# Altium PCB BUZT13-01CN-E-201-20140930.PcbDoc (part 2 of 2)
Units mm, origin at the board's own origin, x right, y up, seen from the top; angles counter-clockwise.
Board outline 64.01 x 46.1 mm, 2 copper layers (Top Layer, Bottom Layer); 112 components, 79 nets, 311 pads, 291 vias.
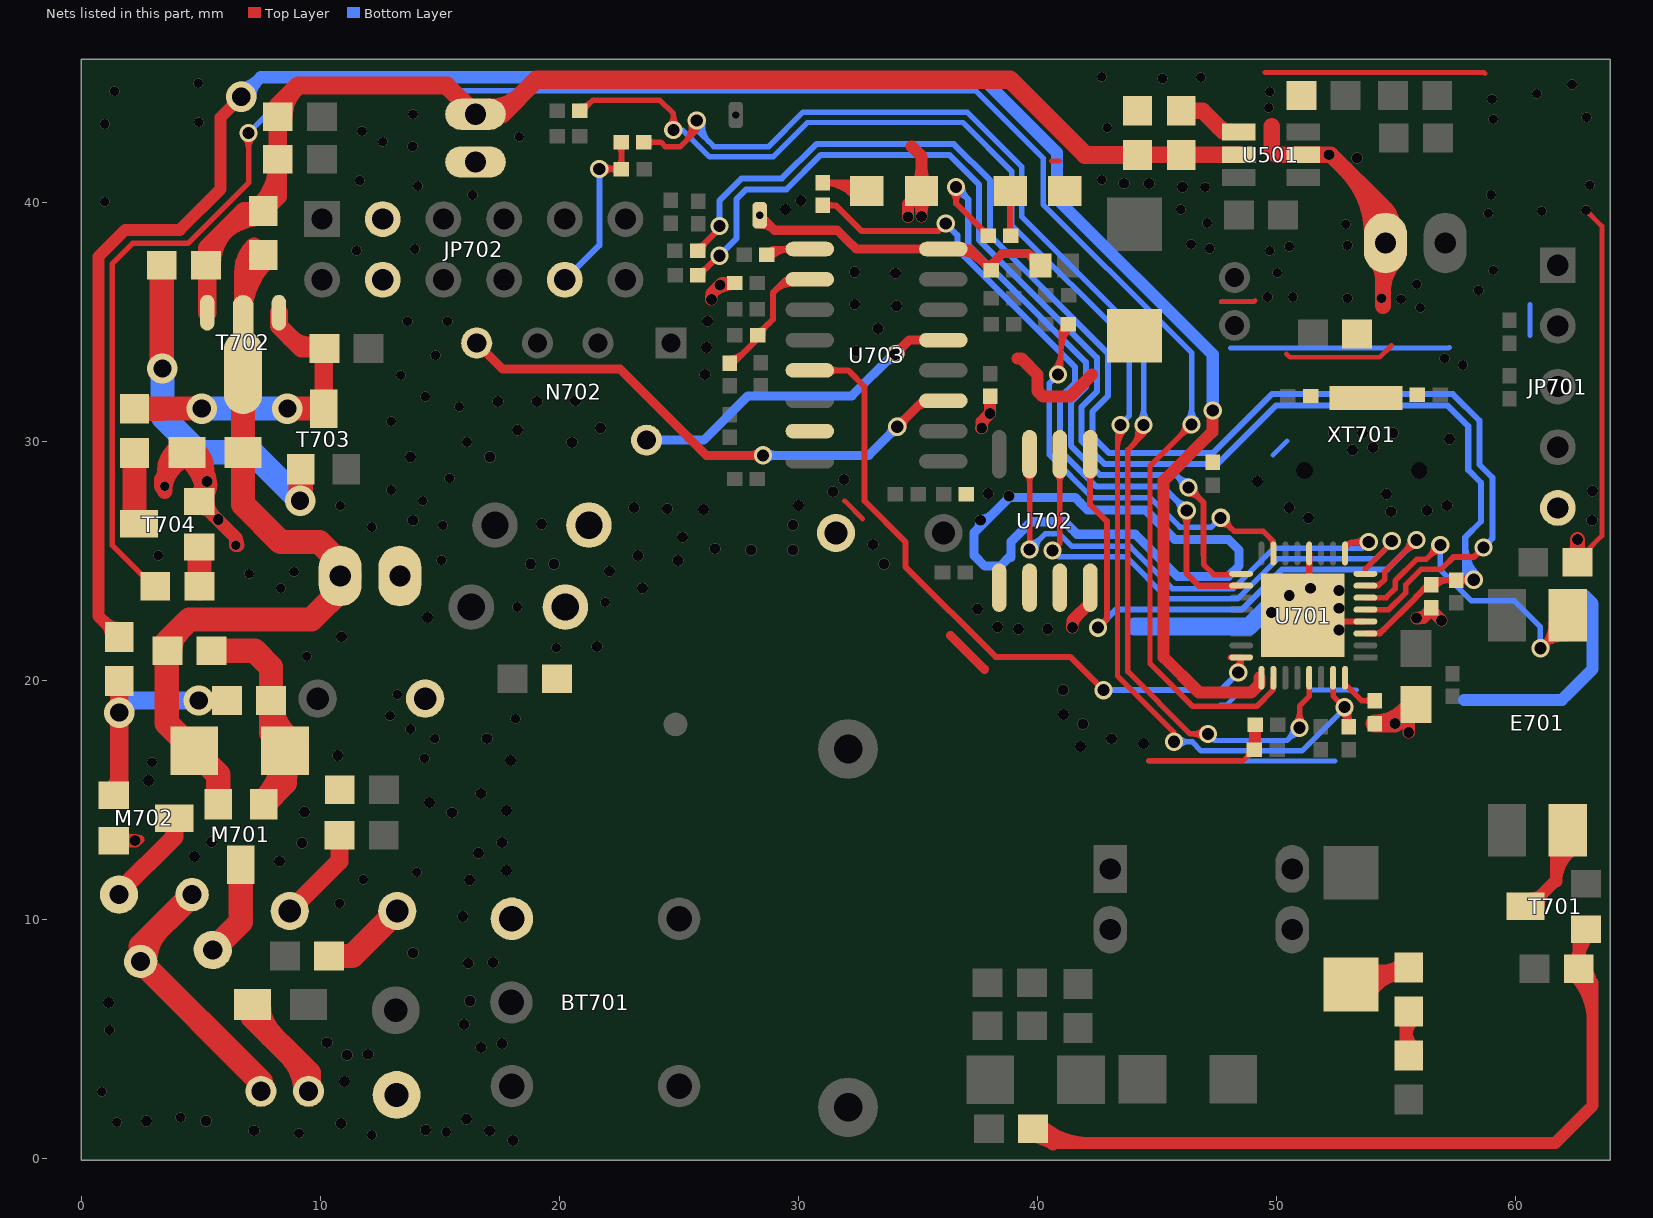
[diagram p2: the nets of this part, all layers, seen from the top]

## Via types
v1: diameter 0.457, hole 0.457, Top Layer to Bottom Layer, 135 vias
v2: diameter 0.406, hole 0.406, Top Layer to Bottom Layer, 96 vias
v3: diameter 0.762, hole 0.508, Top Layer to Bottom Layer, 46 vias
v4: diameter 1.27, hole 0.762, Top Layer to Bottom Layer, 11 vias
v5: diameter 0.889, hole 0.508, Top Layer to Bottom Layer, 3 vias

## Nets (pads, with @x,y where several pads share a name; then routed paths per layer and width w, separated by ;. In a path a pad name is that pad's centre, name@x,y a point inside that pad or via, vN(x,y) a via of type N, cw(c..) or ccw(c..) an arc to the next point about the centre after c; other vN are vias at no path point) (continued)
NetC720_1: C720.1 R726.2 T701.B | length 45.8
  Top Layer w0.508: R726.2@39.723,1.124 ccw(c40.857,2.258) 40.857,0.654 ; R726.2@39.812,1.416 40.574,0.654 42.788,0.654 ; R726.2@39.85,0.893 cw(c39.889,-0.184) 40.651,0.578 ; R726.2@40.082,1.483 ccw(c42.083,3.484) 42.083,0.654 ; 42.276,0.654 42.788,0.654 ; 43.703,0.654 42.788,0.654 ; 44.82,0.654 46.725,0.654 ; C720.1@62.407,8.189 ccw(c61.816,8.779) 62.651,8.779 ccw(c63.487,8.779) C720.1@62.896,8.189 ; C720.1@62.432,7.699 cw(c60.491,5.759) 63.235,5.759 ; C720.1@62.651,8.246 cw(c64.242,8.246) T701.B@63.117,9.371 ; C720.1@62.791,8.059 cw(c61.717,6.985) 63.235,6.985 ; T701.B@62.956,9.697 62.651,9.392 C720.1@62.651,7.944 63.235,7.36 63.235,2.214 61.676,0.654 46.725,0.654 ; 42.788,0.654 46.725,0.654
NetC723_1: C723.1 L702.2 | length 4.1
  Top Layer w0.762: L702.2@8.697,10.357 10.784,12.444 C723.1@10.784,13.583
NetC725_2: C725.2 L704.1 | length 9.2
  Top Layer w1.016: C725.2@7.139,6.445 7.139,5.925 9.362,3.702 9.489,3.575 L704.1@9.489,2.813 ; C725.2@7.406,6.445 ccw(c9.306,6.445) 7.963,5.102 ; 8.708,4.357 cw(c7.165,2.813) L704.1@9.347,2.813 ; 8.981,4.083 cw(c8.02,3.122) L704.1@9.35,2.843
NetC726_1: C726.1 D706.A M701.1 R731.1 | length 16
  Top Layer w1.016: R731.1@5.425,21.254 7.228,21.254 7.914,20.568 C726.1@7.914,19.171 ; M701.1@7.566,14.938 ccw(c5.61,17.063) D706.A@8.498,17.063 ; M701.1@7.609,14.827 8.498,15.716 D706.A@8.498,17.063 ; D706.A@8.151,16.699 cw(c7.311,15.859) 8.498,15.859 cw(c9.686,15.859) D706.A@8.846,16.699 ; D706.A@8.785,17.479 cw(c9.994,19.171) C726.1@7.914,19.171 ; D706.A@8.956,16.783 D706.A@8.498,17.24 ; C726.1@7.914,19.171 7.914,17.825 D706.A@8.498,17.24 ; D706.A@8.498,17.063 D706.A@8.498,17.24
NetC726_2: C726.2 M702.1 R732.1 | length 10.4
  Top Layer w0.762: M702.1@1.264,15.343 ccw(c0.541,16.067) 1.564,16.067 ; M702.1@1.336,15.208 1.564,15.437 R732.1@1.564,19.984 ; v4(4.892,19.171) C726.2@6.064,19.171
  Bottom Layer w0.762: v4(1.564,18.663) 2.072,19.171 v4(4.892,19.171)
NetD701_K: D701.K R723.1 | length 6.9
  Top Layer w0.635: D701.K@52.923,7.207 53.507,7.792 55.412,7.792 ccw(c55.412,5.999) D701.K@53.853,6.885 ; D701.K@53.301,7.198 cw(c54.321,6.619) 54.321,7.792 ; 54.427,7.792 ccw(c54.427,9.082) R723.1@55.339,8.17
NetD707_A: D707.A R734.2 | length 5.3
  Top Layer w0.254: R734.2@38.887,38.627 38.851,38.663 D707.A@38.851,40.5 38.851,39.049 ccw(c39.254,39.049) R734.2@38.98,38.754 ; R734.2@38.74,38.75 ccw(c38.47,39.019) 38.851,39.019 ; R734.2@38.74,38.75 ccw(c38.47,39.019) 38.851,39.019 ; R734.2@38.74,38.75 ccw(c38.47,39.019) 38.851,39.019 ; 38.851,39.071 ccw(c39.305,39.071) 38.984,38.75 cw(c39.305,39.071) 38.851,39.071
NetD708_A: D708.A R733.2 | length 6.3
  Top Layer w0.254: R733.2@31.125,40.725 cw(c31.42,40.43) 31.42,40.847 cw(c31.42,41.265) R733.2@31.125,40.97 ; 31.534,40.847 cw(c31.534,39.485) D708.A@32.594,40.341 ; 32.066,40.847 cw(c32.066,39.914) D708.A@32.792,40.5 ; D708.A@32.397,40.181 ccw(c31.003,39.056) R733.2@31.003,40.847 32.51,40.847 D708.A@32.857,40.5 D708.A@32.872,40.485
NetE701_2: E701.2 T701.C | length 7.6
  Top Layer w0.508: T701.C@60.424,10.662 60.721,10.662 61.711,11.652 61.711,13.126 E701.2@62.067,13.481 ; T701.C@60.653,10.878 ccw(c60.653,11.564) T701.C@61.138,11.079 ; T701.C@60.97,10.56 cw(c61.817,10.56) 61.218,11.159 ; 61.711,11.588 cw(c63.338,11.588) E701.2@62.481,12.971 ; 61.711,12.501 cw(c62.773,12.501) E701.2@62.214,13.403
NetJ701_2: J701.2 N701.2 R709.2 U703.8 | length 16.7
  Top Layer w0.381: N701.2@28.371,39.122 cw(c28.371,38.254) 28.984,38.868 ; N701.2@28.371,39.482 28.997,38.856 31.612,38.856 32.247,38.221 ; 32.257,38.23 32.418,38.068 U703.8@36.057,38.068 37.165,38.068 R709.2@38.054,37.179 38.054,37.411 38.516,37.873 39.627,37.873 J701.2@40.125,37.376 ; U703.8@36.769,37.954 cw(c36.769,36.722) 37.64,37.593 ; U703.8@36.817,37.965 cw(c37.023,37.53) 37.363,37.87 ; R709.2@37.824,37.409 cw(c37.595,37.179) R709.2@37.919,37.179 ; 39.653,37.848 ccw(c40.037,38.232) J701.2@40.096,37.692 ; J701.2@39.705,37.795 cw(c39.337,37.426) J701.2@39.858,37.426
NetL702_1: L702.1 R727.2 | length 3.8
  Top Layer w1.016: R727.2@10.348,8.477 11.318,8.477 L702.1@13.197,10.357 ; L702.1@13.045,10.509 L702.1@13.147,10.611
NetL704_2: L704.2 R729.1 R730.1 | length 12.8
  Top Layer w1.016: R730.1@2.645,8.249 cw(c4.642,8.249) 3.23,9.661 ; R729.1@4.612,11.043 2.453,8.884 R730.1@2.453,8.249 7.362,3.34 7.489,3.213 L704.2@7.489,2.813
NetM701_3: M701.3 R730.2 | length 4.1
  Top Layer w1.016: R730.2@5.476,8.728 6.644,9.896 M701.3@6.644,12.295
NetM702_3: M702.3 R729.2 | length 4.2
  Top Layer w0.762: R729.2@1.552,11.043 1.552,11.145 3.868,13.461 M702.3@3.868,14.243
NetN702_4: N702.4 U703.3 | length 26.1
  Top Layer w0.381: N702.4@16.525,34.131 17.617,33.039 22.529,33.039 25.572,29.996 ; 25.369,30.2 25.572,29.996 ; v3@28.379,29.298 ccw(c28.054,28.973) 28.054,29.432 ccw(c28.054,29.892) v3@28.379,29.567 ; v3(28.514,29.432) 26.136,29.432 25.572,29.996 ; v3(34.127,30.626) 35.219,31.718 U703.3@36.057,31.718 ; v3@34.127,30.817 ccw(c34.127,31.277) 34.452,30.951 ccw(c34.777,30.626) v3@34.318,30.626 ; 34.934,31.434 cw(c35.346,31.022) U703.3@35.346,31.604
  Bottom Layer w0.381: v3(28.514,29.432) 32.933,29.432 v3(34.127,30.626) ; v3@28.648,29.298 cw(c28.974,28.973) 28.974,29.432 cw(c28.974,29.892) v3@28.648,29.567 ; v3@33.937,30.626 cw(c33.477,30.626) 33.802,30.301 cw(c34.127,29.976) v3@34.127,30.436
NetN702_5: N702.5 U703.5 | length 15.4
  Top Layer w0.381: v3(34.051,33.674) 34.635,34.258 U703.5@36.057,34.258 ; v3@34.051,33.865 ccw(c34.051,34.325) 34.376,33.999 ccw(c34.701,33.674) v3@34.241,33.674
  Bottom Layer w0.381: N702.5@23.637,30.067 26.024,30.067 27.879,31.922 32.222,31.922 33.975,33.674 v3(34.051,33.674) ; 33.596,33.295 cw(c34.051,32.84) v3@34.051,33.484
NetR501_2: R501.2 U501.4 | length 4.3
  Top Layer w0.686: R501.2@46.014,43.855 46.907,43.855 47.797,42.966 U501.4@48.42,42.966 ; R501.2@46.196,43.674 cw(c46.635,43.235) 46.635,43.855 cw(c46.635,44.476) R501.2@46.196,44.037 ; 47.592,43.17 ccw(c48.07,43.648) U501.4@48.07,42.973
NetR707_2: R707.2 U701.32 | length 2.7
  Top Layer w0.229: U701.32@52.872,19.739 cw(c52.872,19.453) 53.074,19.655 ; U701.32@52.872,20.124 52.872,19.857 53.573,19.156 R707.2@54.117,19.156 ; R707.2@53.986,19.024 ccw(c53.669,18.707) 53.669,19.156 ccw(c53.669,19.604) R707.2@53.986,19.287
NetR711_1: R711.1 R712.1 U703.10 | length 8.1
  Top Layer w0.254: R712.1@27.117,33.293 27.259,33.293 28.285,34.32 R711.1@28.285,34.462 28.285,34.499 28.71,34.924 28.732,34.924 28.925,35.117 28.925,36.245 29.479,36.798 U703.10@30.469,36.798 ; R712.1@27.117,33.491 ccw(c27.117,34.312) 27.697,33.732 ; R711.1@28.31,34.635 ccw(c28.31,34.903) R711.1@28.5,34.713 ; R711.1@28.483,34.462 cw(c29.05,34.462) 28.649,34.863 ; 28.978,36.297 cw(c29.758,35.517) U703.10@29.758,36.621 ; 29.411,36.731 cw(c29.758,36.384) U703.10@29.758,36.875
NetR713_2: R713.2 U703.9 | length 4
  Top Layer w0.254: R713.2@28.633,37.886 cw(c29.073,37.447) 29.073,38.068 ; R713.2@28.666,37.829 28.905,38.068 U703.9@30.469,38.068 ; R713.2@28.813,37.707 cw(c29.686,36.834) U703.9@29.686,38.068 ; U703.9@29.632,37.943 ccw(c29.329,37.639) 29.329,38.068 ccw(c29.329,38.498) U703.9@29.632,38.194
NetR723_2: R723.2 R724.1 | length 3.8
  Top Layer w0.508: R724.1@55.412,4.439 R723.2@55.412,6.272 ; 55.412,4.978 cw(c56.681,4.978) R723.2@55.784,5.875 ; 55.412,5.479 ccw(c56.681,5.479) R724.1@55.784,4.582
NetR736_1: R736.1 T703.B | length 14.7
  Top Layer w1.016: R736.1@3.342,37.383 3.342,33.09 v4(3.368,33.065) ; v4@9.159,27.731 T703.B@9.159,28.848
  Bottom Layer w1.016: v4(3.368,33.065) 3.368,31.064 4.872,29.559 7.101,29.559 v4(9.133,27.527)
NetR739_1: R739.1 T704.C | length 2.7
  Top Layer w1.016: T704.C@2.199,26.859 R739.1@2.199,29.534
NetR739_2: R739.2 R740.1 T702.B T703.C | length 14.8
  Top Layer w0.762: T702.B@8.244,35.401 8.244,34.843 9.184,33.903 R740.1@10.149,33.903 10.124,33.877 T703.C@10.124,31.38 ; 8.715,34.373 ccw(c9.579,35.237) R740.1@10.041,34.106
  Top Layer w1.016: R739.2@2.199,31.384 3.363,31.384 3.368,31.388 v4(5.019,31.388) ; v4(8.6,31.388) 10.116,31.388 T703.C@10.124,31.38
  Bottom Layer w1.016: v4(5.019,31.388) v4(8.6,31.388)
NetR741_1: R741.1 T704.B | length 1.7
  Top Layer w1.016: R741.1@4.917,23.87 T704.B@4.917,25.597
NetU701_7: U701.7 U702.5 | length 29.2
  Top Layer w0.229: U701.7@53.722,23.974 54.272,23.974 54.541,24.243 54.541,24.567 55.715,25.742 55.76,25.742 55.857,25.838 v3(55.857,25.892) v3@55.857,26.125 ; U701.7@54.097,23.985 ccw(c54.097,24.433) 54.414,24.116 ; 55.395,25.422 ccw(c54.925,25.892) v3@55.59,25.892 ; 55.416,25.443 cw(c55.857,25.002) v3@55.857,25.625
  Top Layer w0.254: U702.5@42.078,28.646 cw(c41.775,28.343) 42.204,28.343 cw(c42.633,28.343) U702.5@42.33,28.646 ; U702.5@42.204,29.483 42.204,27.375 42.903,26.677 42.903,22.587 v3(42.534,22.219)
  Bottom Layer w0.229: v3(55.857,25.892) v3@55.857,26.125
  Bottom Layer w0.254: v3(42.534,22.219) 43.296,22.981 48.56,22.981 50.236,24.657 54.64,24.657 55.857,25.874 v3(55.857,25.892) ; 55.41,25.428 ccw(c54.946,25.892) v3@55.603,25.892 ; 55.454,25.471 cw(c55.857,25.068) v3@55.857,25.638
NetU701_8: U701.8 U702.6 | length 22.7
  Top Layer w0.229: v3(40.629,25.445) 40.934,25.749 U702.6@40.934,29.483 ; U702.6@40.8,28.637 cw(c40.474,28.312) 40.934,28.312 cw(c41.394,28.312) U702.6@41.069,28.637 ; U701.8@53.722,24.474 53.722,24.672 v3@54.828,25.778
  Bottom Layer w0.229: v3(40.629,25.445) 40.883,25.191 43.701,25.191 45.466,23.425 48.375,23.425 50.052,25.102 54.152,25.102 v3@54.828,25.778
  other v3: 54.828,25.851
NetU701_24: U701.24 U703.13 | length 29.3
  Top Layer w0.254: U703.13@30.469,32.988 32.07,32.988 32.755,32.303 32.755,27.527 34.47,25.813 34.47,24.772 38.242,21 41.366,21 v3(42.763,19.603) ; U703.13@31.306,32.863 cw(c31.61,32.559) 31.61,32.988 cw(c31.61,33.418) U703.13@31.306,33.114 ; U701.24@48.072,20.974 U701.24@48.522,20.974 ; v3@48.279,20.562 ccw(c48.051,20.974) U701.24@48.522,20.974 ; v3@48.522,20.561 U701.24@48.522,20.974
  Bottom Layer w0.254: v3(42.763,19.603) 47.665,19.603 v3(48.402,20.339) v3@48.341,20.339
PLCRXD: C702.2 R702.2 R719.2 U701.3 | length 65.6
  Top Layer w0.254: R719.2@25.781,36.976 25.846,36.976 v3@26.558,37.688 ; R719.2@25.806,37.149 ccw(c25.806,37.665) 26.171,37.3 ; R719.2@25.979,36.976 cw(c26.298,36.976) R719.2@26.072,37.202 ; U701.3@53.722,21.974 54.329,21.974 55.849,23.494 55.849,23.519 56.337,24.007 C702.2@56.479,24.007 ; U701.3@54.097,21.972 ccw(c54.097,22.528) 54.49,22.135 ; C702.2@56.613,23.923 cw(c57.216,23.435) 57.216,24.21 ; C702.2@56.682,24.21 57.216,24.21 ; R702.2@57.372,24.122 ccw(c57.216,24.028) 57.216,24.21 ; R702.2@57.372,24.299 cw(c57.216,24.392) 57.216,24.21 ; R702.2@57.398,24.088 ccw(c57.103,23.793) 57.103,24.21 ccw(c57.103,24.628) R702.2@57.398,24.333 ; R702.2@57.52,24.225 v3@58.206,24.225 ; R702.2@57.643,24.113 cw(c57.914,23.841) v3@57.914,24.225 ; R702.2@57.643,24.358 ccw(c57.962,24.677) v3@57.962,24.225 ; v3@58.077,24.046 ccw(c57.644,23.612) 57.644,24.225 ccw(c57.644,24.839) v3@58.077,24.405
  Bottom Layer w0.254: v3@26.659,37.814 v3(26.685,37.789) 27.396,38.5 27.396,40.16 27.802,40.566 29.49,40.566 30.929,42.005 36.311,42.005 37.556,40.761 37.556,38.444 42.484,33.517 42.484,32.097 41.849,31.462 41.849,30.029 42.813,29.065 47.526,29.065 49.977,31.515 57.165,31.515 58.028,30.652 58.028,28.823 58.562,28.289 58.562,26.664 57.901,26.003 57.901,24.581 v3(58.257,24.225) ; 57.901,24.471 ccw(c58.502,24.471) v3@58.077,24.046 ; 57.901,25.084 ccw(c59.116,25.084) v3(58.257,24.225) ; 57.901,25.697 ccw(c59.729,25.697) v3@58.437,24.405 ; v3@58.028,24.225 v3(58.257,24.225)
PLCSTA: R720.2 U701.29 | length 62.9
  Top Layer w0.229: R720.2@23.52,42.539 24.234,42.539 24.424,42.348 25.044,42.348 25.733,43.038 v3(25.733,43.453) ; R720.2@23.561,42.412 23.527,42.445 R720.2@23.571,42.488 ; R720.2@23.676,42.408 cw(c23.993,42.091) 23.993,42.539 cw(c23.993,42.987) R720.2@23.676,42.67 ; 25.252,42.556 ccw(c24.643,43.165) v3@25.475,43.385 ; 25.533,42.837 ccw(c25.087,43.283) v3@25.696,43.444 ; 43.968,29.854 ccw(c43.39,30.432) v3@44.181,30.636 ; 44.251,30.137 ccw(c43.839,30.548) v3@44.403,30.693 ; v3(44.439,30.702) 44.439,30.325 43.779,29.665 43.779,20.382 46.387,17.774 ; 46.624,17.774 46.387,17.774 ; v3@46.943,17.585 ccw(c46.488,17.13) 46.488,17.774 ccw(c46.488,18.418) v3@46.943,17.962 ; v3(47.132,17.774) 46.387,17.774 ; v3@50.779,18.216 ccw(c50.323,18.672) 50.967,18.672 ccw(c51.611,18.672) v3@51.156,18.216 ; v3(50.967,18.028) 50.967,18.94 51.372,19.345 U701.29@51.372,20.124
  Bottom Layer w0.229: v3(25.733,43.453) 25.733,43.072 26.448,42.357 28.749,42.357 30.188,43.796 37.053,43.796 39.347,41.503 39.347,39.413 44.439,34.32 v3(44.439,30.702) ; v3@25.771,43.446 ccw(c26.421,43.321) 25.953,42.853 ; v3@25.995,43.403 ccw(c26.933,43.223) 26.258,42.548 ; v3@44.251,30.891 ccw(c43.796,31.346) 44.439,31.346 ccw(c45.083,31.346) v3@44.628,30.891 ; v3(47.132,17.774) 47.409,17.496 50.436,17.496 v3(50.967,18.028) ; v3@50.701,18.028 cw(c50.057,18.028) 50.512,17.573 cw(c50.967,17.117) v3@50.967,17.761
PLCTXD: R715.1 U701.5 | length 58.9
  Top Layer w0.229: U701.5@53.722,22.974 54.701,22.974 55.404,23.678 55.404,24.006 56.053,24.655 56.891,24.655 57.257,25.02
  Top Layer w0.254: R715.1@25.77,37.992 25.77,38.008 v3@26.685,38.922 ; R715.1@25.77,38.018 R715.1@25.78,38.018 ; R715.1@25.795,38.165 ccw(c25.795,38.485) R715.1@26.022,38.259 ; R715.1@25.968,37.992 cw(c26.484,37.992) 26.119,38.357 ; 57.257,25.02 57.418,25.182 58.273,25.182 v3(58.663,25.572)
  Bottom Layer w0.254: v3(26.685,39.034) 26.685,40.095 27.613,41.024 29.301,41.024 30.74,42.463 36.501,42.463 38.013,40.95 38.013,38.634 42.941,33.706 42.941,31.908 42.306,31.273 42.306,30.218 43.002,29.522 47.335,29.522 49.81,31.997 57.383,31.997 58.498,30.881 58.498,29.04 59.044,28.494 59.044,25.953 v3(58.663,25.572)
PWM_QUAD: R710.1 U701.15 | length 22.5
  Top Layer w0.229: v3@40.669,32.999 ccw(c39.914,33.755) 40.982,33.755 ; v3@40.831,32.838 ccw(c40.466,33.203) 40.982,33.203 ; v3(40.858,32.811) 40.982,32.935 40.982,34.611 R710.1@41.29,34.919 R710.1@41.29,34.795 ; 40.982,33.789 cw(c42.395,33.789) R710.1@41.396,34.788 ; 40.982,34.34 cw(c41.843,34.34) R710.1@41.234,34.949 ; R710.1@41.081,34.89 cw(c40.777,34.842) 40.995,34.624 cw(c41.259,34.36) R710.1@41.263,34.733 ; v3@47.665,26.55 cw(c47.665,25.906) 48.121,26.361 cw(c48.576,26.816) v3@47.932,26.816 ; v3(47.665,26.816) 48.224,26.257 49.44,26.257 49.872,25.826 U701.15@49.872,25.324 ; 49.765,25.933 cw(c49.531,25.699) U701.15@49.862,25.699
  Bottom Layer w0.229: v3(40.858,32.811) 40.49,32.442 40.49,29.466 42.302,27.654 44.722,27.654 45.953,26.423 47.272,26.423 v3(47.665,26.816)
R_LED: R733.1 U701.18 | length 31.8
  Top Layer w0.254: R733.1@31.003,39.897 31.562,39.897 32.628,38.83 35.854,38.83 v3(36.159,39.135) ; R733.1@31.125,39.775 cw(c31.42,39.48) 31.42,39.897 cw(c31.42,40.315) R733.1@31.125,40.02 ; v3@46.063,26.941 cw(c45.63,26.508) 46.243,26.508 cw(c46.856,26.508) v3@46.422,26.941 ; v3(46.243,27.121) 46.243,24.479 46.748,23.974 U701.18@48.522,23.974 ; U701.18@48.519,23.971 U701.18@48.522,23.974 ; U701.18@48.519,23.974 U701.18@48.522,23.974
  Bottom Layer w0.254: v3(36.159,39.135) 36.642,38.653 36.642,38.066 36.933,37.774 36.933,37.762 41.569,33.125 41.569,32.476 40.934,31.841 40.934,30.271 40.934,29.65 42.466,28.119 45.245,28.119 v3(46.243,27.121) ; v3@45.989,27.121 ccw(c45.376,27.121) 45.809,27.555 ccw(c46.243,27.988) v3@46.243,27.375
S\E\T\: R706.2 R716.1 U701.31 | length 64
  Top Layer w0.229: R716.1@20.843,43.86 20.944,43.86 21.376,44.291 24.196,44.291 24.754,43.733 v3(24.754,43.047) ; R716.1@20.868,44.045 ccw(c20.868,44.679) 21.316,44.231 ; R716.1@21.054,43.86 cw(c21.317,43.86) R716.1@21.131,44.046 ; v3@24.566,43.235 ccw(c24.111,43.691) 24.754,43.691 ccw(c25.398,43.691) v3@24.943,43.235 ; 43.347,29.752 cw(c44.425,29.752) v3@43.663,30.514 ; 43.347,30.304 cw(c43.873,30.304) v3@43.501,30.676 ; v3@43.347,30.575 43.347,20.203 45.709,17.841 v3(45.709,17.444) ; U701.31@52.372,20.124 52.372,19.366 v3(52.847,18.891) ; v3@52.695,18.672 cw(c52.262,18.045) R706.2@53.025,18.045 ; v3@52.825,18.86 cw(c52.563,18.48) 53.025,18.48 ; R706.2@52.893,18.22 ccw(c52.576,18.537) 53.025,18.537 ccw(c53.473,18.537) R706.2@53.156,18.22 ; R706.2@53.025,18.063 v3@53.025,18.714
  Bottom Layer w0.229: v3(24.754,43.047) 25.148,43.047 26.269,41.925 28.927,41.925 30.366,43.364 36.874,43.364 38.915,41.324 38.915,40.677 38.915,39.079 43.843,34.152 43.843,31.093 43.474,30.725 v3(43.474,30.702) ; v3(45.709,17.444) 46.471,17.444 46.851,17.065 51.068,17.065 v3@52.847,18.843 ; v3@45.898,17.255 cw(c46.353,16.8) 46.353,17.444 cw(c46.353,18.088) v3@45.898,17.632
S_LED: R734.1 U701.17 | length 31.4
  Top Layer w0.229: 46.954,25.241 46.954,24.863 47.376,24.441 48.489,24.441 48.52,24.472 U701.17@48.522,24.474
  Top Layer w0.254: v3@36.411,40.48 cw(c35.978,40.046) 36.591,40.046 cw(c37.204,40.046) v3@36.77,40.48 ; v3(36.591,40.659) 36.591,39.973 R734.1@37.937,38.627 R734.1@37.861,38.703 ; 37.599,38.965 cw(c37.261,38.627) R734.1@37.739,38.627 ; R734.1@37.659,38.905 ccw(c37.912,39.158) R734.1@37.912,38.8 ; v3@46.319,27.832 cw(c46.319,27.219) 46.753,27.653 cw(c47.186,28.086) v3@46.573,28.086 ; v3(46.319,28.086) 46.954,27.451 46.954,25.241 ; U701.17@48.52,24.472 U701.17@48.522,24.474
  Bottom Layer w0.254: v3@36.591,40.405 cw(c36.591,39.792) 37.024,40.226 cw(c37.458,40.659) v3@36.845,40.659 ; v3(36.591,40.659) 37.099,40.151 37.099,38.255 42.026,33.327 42.026,32.287 41.391,31.652 41.391,29.84 42.623,28.608 45.798,28.608 v3(46.319,28.086) ; v3@46.065,28.086 ccw(c45.452,28.086) 45.885,28.52 ccw(c46.319,28.953) v3@46.319,28.34
SSC_ON/O\F\F\: R741.2 U701.26 | length 93.1
  Top Layer w0.229: R741.2@3.029,23.908 1.259,25.677 1.259,37.433 2.126,38.3 4.436,38.3 6.974,40.839 v3(6.974,42.92) ; v3@6.786,42.731 cw(c6.331,42.276) 6.974,42.276 cw(c7.618,42.276) v3@7.163,42.731 ; 45.986,30.271 cw(c46.446,29.811) v3@46.446,30.461 ; 45.993,30.277 ccw(c45.542,30.728) v3@46.179,30.728 ; v3(46.446,30.728) 46.443,30.728 44.706,28.991 44.706,20.712 46.489,18.93 49.178,18.93 49.862,19.613 49.862,20.114 U701.26@49.872,20.124 ; 49.765,19.516 ccw(c49.532,19.749) U701.26@49.862,19.749
  Bottom Layer w0.229: v3(6.974,42.92) 8.74,44.685 37.421,44.685 40.236,41.871 40.236,39.94 45.623,34.553 46.446,33.729 v3(46.446,30.728) ; v3@46.257,30.916 ccw(c45.802,31.372) 46.446,31.372 ccw(c47.09,31.372) v3@46.635,30.916
SSCOUT: R732.2 U701.25 | length 95
  Top Layer w0.508: 0.931,22.467 ccw(c1.564,23.1) R732.2@1.564,22.205 ; R732.2@0.991,22.407 cw(c0.443,21.859) R732.2@1.218,21.859 ; R732.2@1.564,21.834 0.688,22.71 0.688,37.745 1.815,38.872 4.095,38.872 5.806,40.583 5.806,43.58 v4@6.618,44.392 ; v3(47.335,31.312) 47.318,31.295 47.318,30.415 45.278,28.374 45.278,20.978 46.754,19.501 48.942,19.501 49.29,19.85 U701.25@49.29,20.124
  Bottom Layer w0.508: v4(6.67,44.444) 7.482,45.257 37.658,45.257 40.807,42.108 40.807,40.176 47.335,33.649 v3(47.335,31.312) ; v4@6.67,44.825 ccw(c6.67,45.745) 7.32,45.094 ccw(c7.97,44.444) v4@7.051,44.444
STA: JP702.10 R720.1 R721.1 | length 10.4
  Top Layer w0.254: v3(21.656,41.421) 22.519,41.421 22.577,41.48 22.577,42.532 R720.1@22.57,42.539 ; v3@21.835,41.242 cw(c22.269,40.808) 22.269,41.421 cw(c22.269,42.034) v3@21.835,41.601 ; 22.092,41.421 cw(c22.092,40.944) R721.1@22.43,41.281 ; 22.177,41.421 ccw(c22.177,41.779) R721.1@22.43,41.526 ; R720.1@22.448,42.417 cw(c22.135,42.104) 22.577,42.104 ; R721.1@22.455,41.526 ccw(c22.16,41.821) 22.577,41.821 ccw(c22.995,41.821) R721.1@22.7,41.526 ; R720.1@22.57,42.31 R720.1@22.577,42.303 ; 22.577,42.139 cw(c22.97,42.139) R720.1@22.692,42.417
  Bottom Layer w0.254: JP702.10@20.21,36.78 21.656,38.226 21.656,40.761 ; 21.656,40.964 21.656,40.761 ; v3(21.656,41.421) 21.656,40.761
V_SEND: C727.1 C728.1 D706.K M701.2 R731.2 R735.1 T702.C | length 37.6
  Top Layer w0.762: T702.C@6.744,35.147 6.744,36.975 R735.1@7.584,37.814 ; T702.C@6.744,35.234 cw(c10.14,35.234) R735.1@7.739,37.635 ; 6.744,36.62 cw(c7.701,36.62) R735.1@7.606,37.572 ; 6.744,37.073 cw(c8.3,37.073) R735.1@7.2,38.173
  Top Layer w1.016: R731.2@3.692,21.254 cw(c4.894,21.254) 4.044,22.103 ; D706.K@4.698,16.748 D706.K@4.698,17.063 ; M701.2@5.704,14.827 5.704,16.057 D706.K@4.698,17.063 ; C728.1@6.695,29.509 C728.1@6.746,29.559 ; T702.C@6.746,32.912 C728.1@6.746,29.559 ; C727.1@11.216,24.378 C727.1@10.911,24.378 ; D706.K@4.698,17.063 3.545,18.216 3.545,21.224 R731.2@3.575,21.254 3.575,21.634 4.505,22.565 9.606,22.565 10.911,23.87 C727.1@10.911,24.378 ; C728.1@6.746,29.559 6.746,27.375 8.321,25.8 9.946,25.8 10.911,24.835 C727.1@10.911,24.378
VCC: C500.1 C501.1 R501.1 R735.2 R736.2 R737.1 R738.1 T702.E U501.5 | length 64.6
  Top Layer w0.686: C501.1@44.185,42.005 44.196,42.016 U501.5@48.42,42.016 ; C501.1@44.367,41.824 cw(c44.831,41.36) 44.831,42.016 ; 45.369,42.016 cw(c45.369,41.36) R501.1@45.832,41.824 ; R501.1@46.196,41.824 cw(c46.66,41.36) 46.66,42.016
  Top Layer w0.762: T702.E@5.244,35.401 5.244,37.686 5.243,37.687 5.243,38.115 6.792,39.664 R735.2@7.584,39.664 8.194,40.274 R737.1@8.194,41.828 R738.1@8.194,43.606 8.194,44.057 9.054,44.917 15.267,44.917 C500.1@16.475,43.709 17.578,43.709 19.024,45.155 38.849,45.155 41.999,42.005 C501.1@44.185,42.005 C501.1@44.166,42.025 ; R736.2@5.436,37.383 cw(c7.671,37.383) 6.091,38.963 ; 5.816,38.688 cw(c7.584,36.92) R735.2@7.584,39.42 ; 6.397,39.269 cw(c7.086,38.579) R735.2@7.493,39.465 ; R735.2@7.429,39.844 ccw(c5.584,41.69) R737.1@8.194,41.69 ; R738.1@8.438,43.606 cw(c10.115,43.606) 8.929,44.792 ; C500.1@17.095,43.978 ccw(c17.095,45.794) 18.379,44.51
VSS: BT701.4 C500.2 C501.2 C503.2 C504.2 C701.1 C702.1 C703.1 C704.1 C705.2 C706.2 C707.2 C708.1 C716.1 C717.2 C721.2 C724.2 C727.2 C728.2 D501.A D704.K D705.A D707.K D708.K JP701.5 JP702.3 JP702.4 L701.1 L703.1 M702.2 R502.1 R707.1 R728.1 T704.E TVS701.1 U501.2 U701.4 U701.12 U701.33 U702.1 U702.2 U702.3 U702.4 U703.15 XT701.3 | length 209.1
  Top Layer w0.203: C728.2@4.158,29.149 cw(c2.67,27.464) T704.E@4.917,27.464 ; C728.2@4.292,29.301 cw(c3.068,27.915) T704.E@4.917,27.915 ; C728.2@4.396,29.559 C728.2@4.917,29.038 ; C728.2@4.427,29.453 cw(c3.466,28.366) 4.917,28.366 ; C728.2@4.561,29.605 cw(c3.864,28.816) 4.917,28.816 ; T704.E@4.585,27.834 ccw(c3.783,28.637) 4.917,28.637 ccw(c6.051,28.637) T704.E@5.249,27.834 ; T704.E@4.728,27.691 ccw(c4.273,28.146) 4.917,28.146 ccw(c5.561,28.146) T704.E@5.106,27.691 ; T704.E@4.917,27.445 cw(c5.919,27.445) v1@5.309,28.24 ; T704.E@4.917,27.502 C728.2@4.917,29.038 ; T704.E@4.917,27.857 cw(c5.602,27.857) v1@5.185,28.401 ; 4.917,28.269 cw(c5.286,28.269) 5.061,28.562 ; 4.917,28.395 ccw(c5.258,28.395) 5.112,28.088 ; 4.917,28.717 ccw(c5.41,28.717) v1@5.199,28.271 ; v1@5.286,28.455 cw(c5.563,29.038) C728.2@4.917,29.038 ; 31.921,27.527 32.681,26.768 ; 40.579,41.751 40.932,41.751 ; 44.643,16.662 48.626,16.662 C706.2@49.077,17.113 ; 47.689,35.859 49.062,35.859 49.113,35.909 ; 48.696,16.732 ccw(c48.315,17.113) C706.2@48.854,17.113 ; 48.756,16.792 cw(c49.052,16.496) C706.2@49.052,16.915 ; 49.519,45.454 58.695,45.454 58.74,45.409 ; 50.418,33.684 50.562,33.54 54.325,33.54 54.814,34.03 ; C721.2@62.956,24.895 62.956,25.394 63.62,26.058 63.62,39.03 v2(62.956,39.694) ; v2@62.956,39.592 cw(c62.956,39.347) 63.129,39.521 cw(c63.303,39.694) v2@63.058,39.694
  Top Layer w0.254: U701.33@51.242,23.676 ccw(c51.048,23.87) U701.33@51.323,23.87 ; U701.33@51.372,24.241 ccw(c51.796,24.241) U701.33@51.496,23.942 ; U701.12@51.372,25.324 51.372,23.806 51.094,23.528 U701.33@51.094,22.738 51.358,22.474 U701.4@53.722,22.474
  Top Layer w0.381: v1(2.225,13.303) 2.377,13.303 v1@2.428,13.354 ; 36.362,21.889 37.772,20.479 ; C702.1@56.428,23.006 C702.1@56.479,23.057
  Top Layer w0.508: v1@26.329,35.96 cw(c26.881,35.96) 26.491,36.351 ; 26.348,36.208 cw(c27.295,35.262) C717.2@27.295,36.6 ; v1@26.355,35.986 26.355,36.214 26.786,36.646 C717.2@27.32,36.646 ; 26.532,36.392 cw(c27.094,35.83) C717.2@27.284,36.601 ; v1(34.584,39.415) 34.584,39.941 D708.K@35.143,40.5 ; 34.737,42.361 35.143,41.955 D708.K@35.143,40.5 ; D708.K@34.874,40.231 cw(c34.223,39.58) 35.143,39.58 cw(c36.063,39.58) D708.K@35.412,40.231 ; D708.K@34.874,40.769 ccw(c34.223,41.42) 35.143,41.42 ccw(c36.063,41.42) D708.K@35.412,40.769 ; v1(35.143,39.433) D708.K@35.143,40.5 ; v1@37.64,30.575 cw(c38.223,30.575) 37.811,30.988 ; v1(37.665,30.575) 37.665,30.842 v1(38.013,31.19) C716.1@38.013,31.896 ; 39.155,33.482 39.323,33.482 39.994,32.811 39.994,32.125 40.223,31.896 41.366,31.896 42.28,32.811 ; v1@41.442,22.219 cw(c42.117,22.219) 41.64,22.696 ; v1(41.468,22.219) 41.468,22.524 42.204,23.26 U702.4@42.204,23.895 U702.4@42.204,23.341 ; 49.077,17.494 49.103,17.52 C707.2@49.103,18.155 ; C701.1@55.393,18.644 55.539,18.498 v1(55.539,17.825) ; v1@55.869,22.6 ccw(c55.869,23.213) C702.1@56.303,22.779 ; C702.1@56.435,23.045 cw(c55.869,23.216) v1(55.869,22.625) 56.149,22.625 C702.1@56.479,22.955 ; C702.1@56.479,23.057 C702.1@56.479,22.955 ; v1(56.911,22.524) C702.1@56.479,22.955
  Top Layer w0.559: M702.2@1.336,13.303 v1(2.225,13.303) ; M702.2@1.606,13.097 cw(c2.104,12.598) 2.104,13.303 cw(c2.104,14.009) M702.2@1.606,13.51 ; T704.E@4.917,27.502 6.441,25.978 v2(6.441,25.673) ; T704.E@4.981,27.21 cw(c4.981,26.658) T704.E@5.371,27.048 ; T704.E@5.273,27.502 ccw(c6.131,27.502) 5.524,26.895 ; 6.356,26.064 cw(c5.965,25.673) v2@6.517,25.673
  Top Layer w0.635: v2@3.355,28.137 cw(c4.276,28.137) 3.625,28.788 ; v2@3.364,28.092 cw(c3.817,28.285) 3.469,28.633 ; 3.469,27.927 cw(c4.879,27.927) C728.2@4.387,29.248 ; v2(3.469,28.137) 3.469,28.633 ; v2@3.469,28.334 cw(c4.366,28.334) C728.2@4.296,29.228 ; 3.469,28.841 cw(c4.538,28.841) C728.2@4.165,29.843 ; 3.615,28.778 ccw(c2.834,29.559) C728.2@3.938,29.559 ; C728.2@4.345,29.278 cw(c3.344,27.677) T704.E@5.231,27.677 ; C728.2@4.504,29.227 cw(c4.466,28.463) v1@5.231,28.463 ; C728.2@4.681,29.816 cw(c4.06,28.823) 5.231,28.823 ; T704.E@4.801,27.682 ccw(c3.762,28.721) 5.231,28.721 ; C728.2@4.853,29.557 ccw(c5.931,29.548) 5.169,28.787 ; 5.112,28.844 cw(c4.609,28.34) v1@5.32,28.34 ; C721.2@62.396,25.162 ccw(c61.904,25.654) 62.6,25.654 ; C721.2@62.596,24.937 62.6,24.941 v1(62.6,25.902) ; 62.6,25.634 ccw(c63.268,25.634) C721.2@62.796,25.162 ; 3.469,28.633 C728.2@4.396,29.559 5.231,28.724 T704.E@5.231,27.816 ; T704.E@5.231,27.816 T704.E@4.917,27.502 T704.E@5.231,27.816 ; T704.E@5.179,27.764 ccw(c4.768,28.175) 5.315,28.37 cw(c4.768,28.175) T704.E@5.179,27.764
  Top Layer w0.686: D501.A@44.058,34.69 44.236,34.69 D501.A@44.274,34.652 ; 49.799,43.199 49.799,42.209 49.992,42.016 U501.2@51.12,42.016 52.278,42.016 54.462,39.832 ; 52.878,41.415 cw(c50.156,38.692) C504.2@54.006,38.692 ; 53.943,40.351 cw(c53.169,39.577) C504.2@54.093,38.991 ; 54.049,40.244 cw(c52.497,38.692) C504.2@54.692,38.692 ; C504.2@54.169,37.559 cw(c53.464,36.853) 54.462,36.853 ; C504.2@54.169,39.086 ccw(c53.464,39.792) 54.462,39.792 ; 54.462,36.362 cw(c56.153,36.362) C504.2@54.957,37.559 ; 54.462,35.695 54.462,38.399 54.462,39.832 ; 54.548,39.745 cw(c53.91,39.107) C504.2@54.672,38.624 ; C504.2@54.841,39.175 cw(c55.219,39.832) 54.462,39.832
  Top Layer w0.762: v1(54.955,18.206) R707.1@54.117,18.206 ccw(c54.117,20.004) C701.1@55.619,19.016 ; C701.1@55.393,18.644 C701.1@55.742,18.993
  Bottom Layer w0.203: 44.643,16.636 52.446,16.636 ; 47.665,18.993 47.918,18.993 48.3,19.376 ; 47.689,35.859 49.037,35.859 ; 48.064,33.92 57.208,33.92 57.241,33.953 ; 49.852,29.435 50.453,30.036 ; 51.374,19.603 53.348,19.603 ; 60.617,34.436 60.617,35.754
  Bottom Layer w0.381: 37.467,26.321 ccw(c37.186,26.602) v1@37.57,26.705 ; v1@37.607,26.753 ccw(c37.607,27.458) 38.105,26.959 ; 37.934,26.788 ccw(c37.922,26.799) 37.938,26.803 ; v1@38.828,27.758 ccw(c39.046,27.976) 39.046,27.667 ; 40.985,27.667 40.452,27.667 ; 40.452,27.667 41.57,27.667 41.789,27.448 42.091,27.147 44.511,27.147 45.743,25.915 47.986,25.915 48.44,25.461 48.44,24.819 47.986,24.365 45.856,24.365 44.09,26.131 41.65,26.131 41.427,26.354 41.129,26.651 39.724,26.651 38.89,25.816 38.89,25.165 38.804,25.165 38.436,24.797 37.794,24.797 37.34,25.251 37.34,26.194 38.813,27.667 40.452,27.667
  Bottom Layer w0.508: 57.851,19.196 61.945,19.196 62.169,19.42 ; 62.616,19.867 62.169,19.42 ; 62.931,23.54 63.235,23.235 63.235,20.486 62.169,19.42
  Bottom Layer w0.762: 44.058,22.27 48.854,22.27 50.149,23.565 v1(50.535,23.565) ; 49.444,22.859 cw(c49.799,22.504) v1@49.799,23.006 ; v1@49.646,22.854 cw(c50.149,22.854) 49.794,23.209 ; 50.137,23.552 cw(c50.535,23.154) 50.535,23.717 ccw(c50.535,23.154) 50.137,23.552
  other v1: 18.049,0.756 7.203,1.162 17.058,1.162 14.391,1.188 10.835,1.467 2.707,1.569 5.196,1.569 16.093,1.645 10.988,3.22 11.089,4.337 11.978,4.363 16.703,4.642 17.592,4.82 10.251,4.845 15.991,5.607 1.107,6.522 16.245,6.598 16.169,8.173 17.211,8.198 13.858,8.604 15.941,10.128 16.22,11.652 17.769,12.059 8.27,12.44 4.714,12.643 16.601,12.795 9.21,13.202 17.592,13.227 5.425,13.253 15.483,14.472 9.311,14.497 17.769,14.573 14.544,14.904 16.703,15.285 2.783,15.818 17.947,16.656 10.708,16.859 41.798,17.24 44.439,17.367 16.957,17.571 43.093,17.571 41.899,18.18 41.087,18.587 41.061,19.603 21.554,21.431 10.861,21.838 52.618,22.117 39.207,22.168 40.426,22.168 38.318,22.244 14.467,22.651 49.799,22.854 37.48,23.006 52.618,23.032 52.618,23.768 23.459,23.87 51.424,23.87 22.087,24.581 18.785,24.886 19.751,24.886 33.568,24.886 24.958,25.038 23.281,25.241 28.006,25.47 29.758,25.47 26.507,25.521 33.111,25.699 25.135,26.003 29.758,26.511 19.243,26.562 13.858,26.715 37.607,26.715 63.21,26.715 5.704,26.74 51.348,26.816 54.803,27.07 56.301,27.121 26.024,27.172 24.5,27.197 23.103,27.248 50.535,27.248 29.987,27.324 57.139,27.324 38.801,27.731 54.599,27.807 37.937,27.832 31.435,27.908 63.235,27.934 5.231,28.34 49.215,28.34 31.892,28.416 13.756,29.356 17.084,29.356 53.177,29.661 54.041,29.763 20.513,29.966 57.241,30.118 52.415,30.372 53.609,30.372 54.879,30.372 18.227,30.499 21.706,30.575 17.414,31.693 19.039,31.693 20.665,31.718 26.075,32.811 32.425,33.801 26.151,33.954 33.314,34.741 26.177,35.046 34.102,35.681 32.349,35.757 26.355,35.96 26.71,36.57 34.051,37.052 32.349,37.103 29.453,39.719 30.088,40.1 46.065,40.659 43.627,40.822 44.668,40.819 53.38,41.878 52.201,42.016
  other v2: 12.131,0.984 9.083,1.061 15.255,1.111 1.463,1.518 4.13,1.721 0.828,2.788 1.158,5.379 10.784,10.687 11.775,11.678 14.01,11.983 2.936,16.58 14.34,16.758 14.772,17.571 13.756,17.977 18.15,18.409 12.893,18.536 13.197,19.425 9.413,21.025 19.852,21.381 18.227,23.082 21.91,23.286 8.321,23.87 7,24.479 7,24.479 8.879,24.556 15.052,25.038 3.19,25.241 12.131,26.435 15.102,26.511 10.81,27.324 14.264,27.527 12.943,27.985 15.382,28.467 16.118,29.991 12.943,30.855 15.788,31.464 14.366,31.896 13.35,32.785 57.8,33.217 57.038,33.496 14.798,33.623 13.629,35.046 15.306,35.046 56.022,35.605 55.209,35.96 52.974,36.011 54.396,36.011 49.621,36.062 50.688,36.062 58.46,36.341 55.869,36.595 50.027,37.078 59.07,37.179 11.496,37.992 49.723,37.992 13.934,38.068 47.208,38.094 50.535,38.17 52.974,38.221 46.421,38.272 52.898,39.11 47.106,39.161 58.867,39.567 61.102,39.643 45.989,39.719 0.955,40.05 16.347,40.329 58.994,40.329 47.005,40.659 14.061,40.71 63.108,40.735 11.623,40.939 42.687,40.964 13.832,42.361 12.588,42.564 18.303,42.767 11.724,42.996 42.915,43.148 0.955,43.301 4.892,43.377 59.07,43.504 62.981,43.58 13.858,43.707 49.672,43.987 59.019,44.342 60.899,44.571 49.723,44.647 1.361,44.672 62.372,44.952 4.866,45.003 45.227,45.206 46.827,45.257 42.687,45.282
WP: U701.9 U702.7 | length 24.5
  Top Layer w0.229: U702.7@39.53,28.637 cw(c39.204,28.312) 39.664,28.312 cw(c40.124,28.312) U702.7@39.799,28.637 ; v3(39.664,25.495) U702.7@39.664,29.483 ; U701.9@52.872,25.324 52.872,25.546 53.126,25.8 ; U701.9@52.873,25.71 ccw(c52.904,26.022) 53.126,25.8 ; v3@53.674,25.612 ccw(c53.219,25.156) 53.219,25.8 ccw(c53.219,26.444) v3@53.674,25.989 ; v3(53.863,25.8) 53.126,25.8
  Bottom Layer w0.229: v3(39.664,25.495) 40.312,26.143 40.919,26.143 41.439,25.623 43.88,25.623 45.645,23.857 48.197,23.857 49.877,25.537 53.6,25.537 v3(53.863,25.8) ; v3@39.664,25.762 ccw(c39.664,26.406) 40.12,25.951 ccw(c40.575,25.495) v3@39.931,25.495
ZCP_DET: E701.3 U701.6 | length 19.3
  Top Layer w0.229: U701.6@53.722,23.474 54.59,23.474 54.973,23.857 54.973,24.185 55.874,25.087 56.273,25.087 v3(56.86,25.673) ; v3@56.593,25.673 cw(c55.949,25.673) 56.405,25.218 cw(c56.86,24.763) v3@56.86,25.407 ; v3@61.02,21.324 cw(c62.058,20.286) E701.3@62.151,21.751 ; v3(61.051,21.355) 62.194,22.498 E701.3@62.194,22.735 ; v3@61.051,21.622 ccw(c61.051,22.266) 61.506,21.811 ccw(c61.962,21.355) v3@61.318,21.355 ; v3@61.068,21.372 ccw(c60.005,22.435) E701.3@61.508,22.435 ; 61.377,21.682 cw(c62.1,20.959) E701.3@62.165,21.979 ; E701.3@61.458,21.763 ccw(c60.786,22.435) E701.3@61.737,22.435
  Bottom Layer w0.229: v3(56.86,25.673) 56.86,24.635 58.145,23.349 58.524,23.349 59.953,23.349 61.051,22.251 v3(61.051,21.355)
pads on no net: BT701.5 JP702.6 JP702.12 U701.1 U701.14 U701.21 U701.22 U701.23 U703.2 U703.14

## Polygon pours and split planes (outlines as drawn)
VSS on Top Layer "TopLayer-No Net 1" (hatched 90Degree grid 0.203 track 0.203, remove dead copper, pour order 1002): 37.937,19.496 41.112,16.219 54.957,16.203 55.819,16.219 58.257,18.632 58.536,18.911 58.534,20.675 58.534,23.418 63.512,23.418 63.494,23.412 63.494,33.704 48.023,33.704 48.023,32.124 41.851,32.124 40.096,32.094 40.096,26.176 37.404,24.042 37.429,21.629 37.429,20.054
VSS on Top Layer "TopLayer-No Net 1" (hatched 90Degree grid 0.203 track 0.203, remove dead copper, pour order 1003): 63.965,45.975 64.025,45.914 64,38.5 59.908,38.5 59.908,34.436 56.581,34.436 56.581,33.573 48.072,33.547 48.072,32.582 45.582,32.582 45.582,32.303 42.026,32.328 42.052,33.776 42.052,46
VSS on Top Layer "TopLayer-No Net 1" (hatched 90Degree grid 0.203 track 0.203, remove dead copper, pour order 1001): 11.296,36.156 11.724,36.163 14.137,36.163 14.721,36.149 17.694,36.156 24.093,36.156 24.097,36.151 24.094,39.451 24.094,42.728 26.304,42.677 26.304,45.986 24.069,45.986 11.296,45.992
VSS on Top Layer "TopLayer-No Net 1" (solid, remove dead copper, pour order 1000): 18.454,0.018 -0.188,-0.008 -0.188,45.788 0.022,45.998 9.16,45.998 9.16,35.526 24.45,35.45 24.449,46.053 41.518,46.053 41.494,32.402 39.549,31.372 39.472,22.406 38.177,22.457 37.161,22.457 34.47,24.772 35.586,22.381 34.965,23.006 33.213,24.759 31.344,24.743 25.439,24.765 21.02,20.294 18.429,17.715
VSS on Bottom Layer "TopLayer-No Net 1" (hatched 90Degree grid 0.203 track 0.203, remove dead copper, pour order 1006): 10.048,46.008 10.072,36.323 22.362,36.349 22.386,36.374 22.41,38.94 24.695,38.94 24.695,41.657 38.477,41.657 38.501,41.632 38.597,41.734 38.597,46.008
VSS on Bottom Layer "TopLayer-No Net 1" (hatched 90Degree grid 0.203 track 0.203, remove dead copper, pour order 1004): 64.092,45.958 64.099,45.952 64.051,45.906 64,38.825 59.476,38.825 59.476,34.804 54.574,34.837 54.574,34.69 48.529,34.69 46.04,37.079 41.747,41.174 41.772,45.958
VSS on Bottom Layer "TopLayer-No Net 1" (hatched 90Degree grid 0.203 track 0.203, remove dead copper, pour order 1005): 41.003,16.301 41.079,16.214 55.503,16.187 58.888,20.149 60.586,20.136 63.891,20.136 63.81,22.237 63.81,36.435 60.508,36.435 60.508,33.946 57.358,33.963 56.316,33.819 51.736,33.822 43.057,33.814 43.066,29.011 40.19,28.975 40.19,24.683 39.175,24.636 39.156,22.016 40.198,21.99 40.241,17.063
VSS on Bottom Layer "TopLayer-No Net 1" (hatched 90Degree grid 0.203 track 0.203, remove dead copper, pour order 1007): 18.481,-0.006 18.405,0.003 -0.042,-0.005 -0.042,45.918 -0.118,45.995 -0.111,46.001 9.052,46.001 9.052,35.352 9.128,35.276 24.241,35.276 24.241,38.857 24.247,46.028 39.564,46.028 39.506,34.565 39.512,31.306 39.513,30.763 39.514,30.499 39.285,18.79 39.285,18.449 37.33,20.403 35.374,22.32 33.037,24.672 31.335,24.683 25.44,24.683 18.455,17.698 18.455,8.243 18.481,3.651

## Keep-outs
Keep-Out Layer:
  circle w0.127: c3,42 r1.425
  circle w0.127: c61,42 r1.6
  circle w0.127: c3,4 r1.6
  circle w0.127: c61,4 r1.6
  lines w0.127: 0,1.5 ccw(c1.5,1.5) 1.5,0 62.5,0 ccw(c62.5,1.5) 64,1.5 64,44.5 ccw(c62.5,44.5) 62.5,46 1.5,46 ccw(c1.5,44.5) 0,44.5 0,1.5
  lines w2: 57.673,5.963 57.673,10.001
  lines w2.5: 21.706,1.569 21.706,11.246 ; 33.073,5.29 34.991,3.372 34.991,1.797 ; 35.219,20.39 40.68,14.929 42.814,14.929 56.606,14.929 58.892,17.215 61.127,17.215

## Other copper
Top Layer:
  pour cut-out: 58.562,45.18 58.562,40.837 53.533,40.837 53.533,42.59 51.653,42.59 51.628,45.18
  pour cut-out: 41.823,41.269 41.823,38.068 42.23,38.068 42.23,41.269
Bottom Layer:
  rectangle net VSS: 8.676,41.243 10.226,43.428
  rectangle net VSS: 9.438,41.243 10.988,43.428
  rectangle net VSS: 59.298,34.69 60.187,36.748
  rectangle net VSS: 59.476,33.827 60.797,36.748

## Silkscreen, mask and mechanical layers (free items; w line width, h text height)
Top Overlay:
  circle w0.127: c3,4 r2.95
  circle w0.127: c61,42 r2.95
  lines w0.076: 13.477,44.825 14.01,44.291 ; 13.68,44.291 14.01,44.291 ; 14.01,44.622 14.01,44.291 ; 21.681,21.939 21.681,22.244 ; 46.903,40.227 47.411,40.227 ; 47.259,40.075 47.411,40.227 ; 47.259,40.38 47.411,40.227 ; 48.249,43.682 48.376,43.555 ; 48.376,43.91 48.376,43.555 ; 48.503,43.682 48.376,43.555 ; 49.545,45.104 49.951,45.104 ; 49.799,44.952 49.951,45.104 ; 49.799,45.257 49.951,45.104 ; 53.152,42.539 53.71,42.539 ; 53.533,42.361 53.71,42.539 ; 53.533,42.717 53.71,42.539 ; 58.028,44.215 57.876,44.368 ; 58.028,44.52 57.876,44.368 ; 58.46,44.799 58.46,44.571 58.257,44.368 57.876,44.368
  lines w0.102: 0.294,9.773 0.65,9.773 ; 0.421,9.087 0.421,9.544 0.65,9.773 ; 0.65,9.417 0.65,9.773 ; 2.58,17.393 3.164,17.393 ; 2.91,17.139 3.164,17.393 ; 2.91,17.647 3.164,17.393 ; 6.543,11.144 6.695,11.297 ; 6.695,10.814 6.695,11.297 ; 6.797,21.254 6.619,21.431 ; 6.797,21.609 6.619,21.431 ; 6.847,11.144 6.695,11.297 ; 7.254,22.041 7.254,21.584 7.101,21.431 6.619,21.431 ; 11.775,7.715 11.546,7.944 ; 11.775,8.173 11.546,7.944 ; 12.08,7.944 11.546,7.944 ; 14.086,7.385 14.086,7.207 ; 14.264,7.207 14.086,7.207 ; 14.417,7.538 14.086,7.207 ; 14.721,12.059 14.721,11.83 ; 14.925,12.516 14.925,12.033 14.721,11.83 ; 14.95,11.83 14.721,11.83 ; 20.157,42.005 20.284,42.132 ; 20.284,41.726 20.284,42.132 ; 20.411,42.005 20.284,42.132 ; 22.367,43.453 22.545,43.275 ; 22.545,43.758 22.545,43.275 ; 22.722,43.453 22.545,43.275 ; 26.024,41.193 26.355,40.862 26.685,41.193 ; 26.329,40.862 26.329,45.561 ; 28.818,26.943 29.885,28.01 29.428,28.01 ; 29.887,27.555 29.887,28.012 ; 30.063,39.364 30.233,39.194 ; 30.411,39.356 30.241,39.186 30.241,39.542 30.368,39.669 30.487,39.669 ; 34.229,24.962 34.508,25.241 ; 34.787,24.962 34.508,25.241 ; 36.235,22.066 37.378,22.066 37.81,22.498 37.81,25.038 37.581,25.267 37.404,25.267 35.422,25.267 35.118,24.962 35.118,24.429 34.61,23.921 34.508,23.921 ; 36.515,22.066 32.552,22.066 32.457,22.162 32.266,22.352 32.171,22.447 32.171,23.692 32.4,23.921 34.508,23.921 ; 43.601,18.18 46.522,18.18 ; 45.963,28.975 45.963,28.874 46.09,28.747 46.548,28.747 ; 46.454,28.653 46.548,28.747 ; 46.454,28.84 46.548,28.747 ; 48.326,31.033 48.58,30.779 ; 48.58,31.617 48.58,30.779 ; 48.834,31.033 48.58,30.779 ; 52.161,39.923 52.567,39.923 ; 52.415,39.77 52.567,39.923 ; 52.415,40.075 52.567,39.923 ; 53.968,17.44 54.168,17.639 54.168,16.936 ; 54.201,17.621 54.375,17.447 ; 57.663,21.762 57.884,21.982 ; 57.884,20.84 57.884,21.982 ; 58.105,21.762 57.884,21.982 ; 34.508,23.921 34.508,25.241
  lines w0.127: 2.5,0 2.5,1.093 ; 2.5,44.977 2.5,46 ; 3.5,0 3.5,1.093 ; 3.5,44.952 3.5,46 ; 26.296,29.534 26.278,29.534 26.278,29.542 26.601,29.864 ; 28.895,32.252 28.92,32.252 ; 30.038,45.434 30.038,41.066 30.304,41.332 ; 32.705,42.285 33.416,42.285 ; 33.035,41.846 33.035,42.615 ; 33.644,42.945 33.873,42.717 ; 33.873,43.453 33.873,42.717 ; 34.102,42.945 33.873,42.717 ; 38.674,42.386 39.385,42.386 ; 39.004,41.948 39.004,42.717 ; 39.436,45.206 39.74,44.901 39.74,43.047 39.969,43.275 ; 39.486,43.275 39.714,43.047 ; 46.243,17.901 46.522,18.18 ; 59.502,7.411 59.705,7.207 59.857,7.207 ; 60.5,0 60.5,1.035 ; 60.5,44.907 60.5,46 ; 61.5,0 61.5,1.035 ; 61.5,44.907 61.5,46
Bottom Overlay:
  drawing of 934 lines, arcs and shapes, not listed
  text "BUZT13-01CN-E-201" at 56.555,42.717 h0.86
  text "Ver:20140930" at 55.429,40.862 h1.02

## Text inside footprints (layer, text, board x,y; h text height)
C500: Top Overlay "+" at 15.153,42.996 h1.02 r90; Top Overlay "+" at 14.696,44.698 h1.02 r90
C504: Top Overlay "+" at 58.994,35.833 h1.52; Top Overlay "+" at 56.428,39.846 h1.02
C727: Top Overlay "+" at 11.445,22.854 h1.02 r180; Top Overlay "+" at 9.718,22.168 h1.52 r180